# Altium PCB PCB1.PcbDoc
Units mil, origin at the board's own origin, x right, y up, seen from the top; angles counter-clockwise.
Board outline 2915 x 1720 mil, 2 copper layers (Top Layer, Bottom Layer); 19 components, 26 nets, 87 pads, 2 vias.
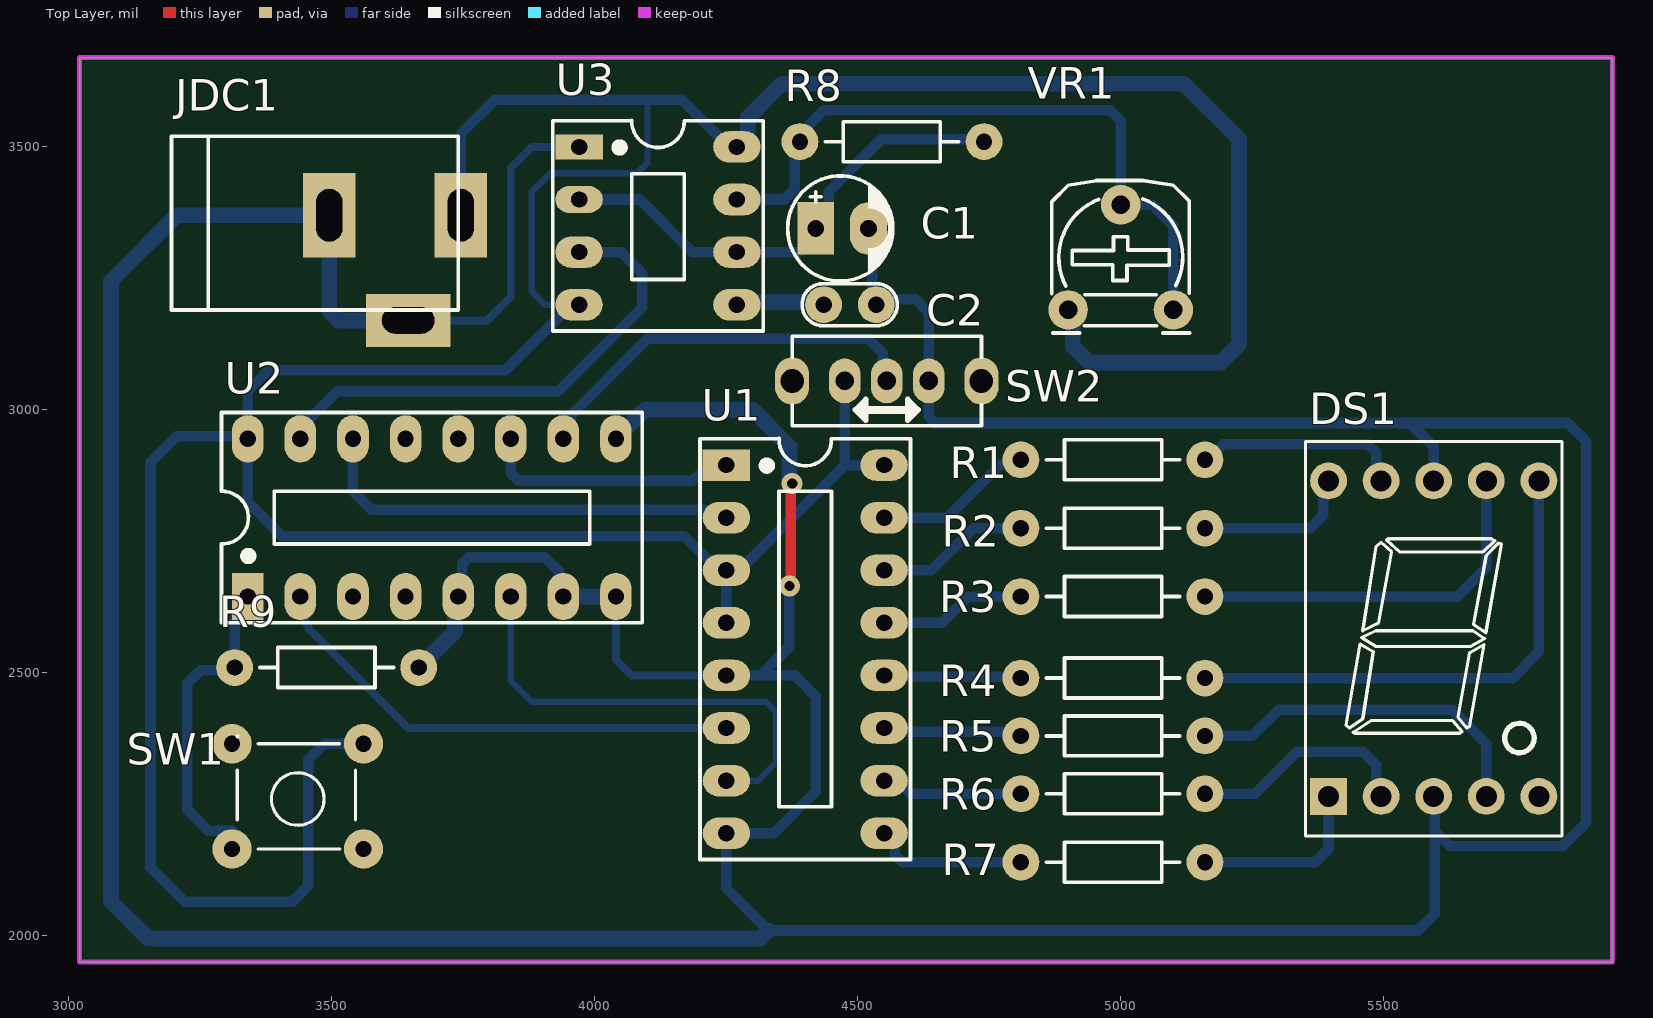
[diagram p0: Top Layer view]
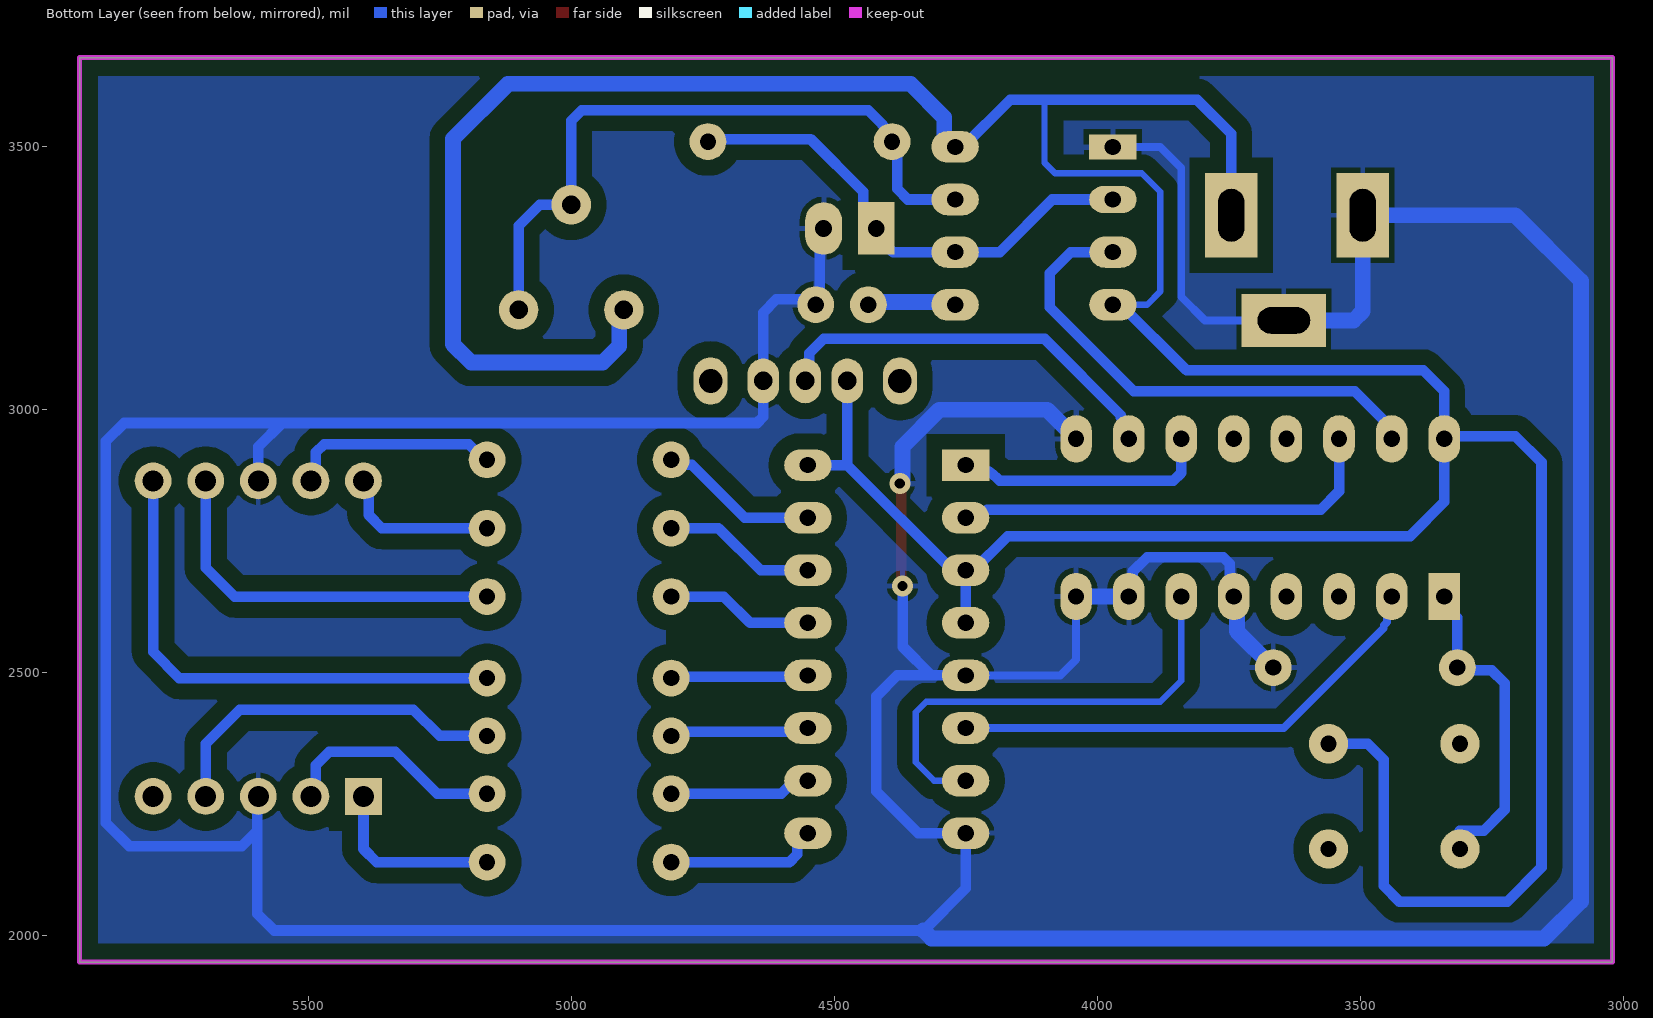
[diagram p1: Bottom Layer view, seen from below]
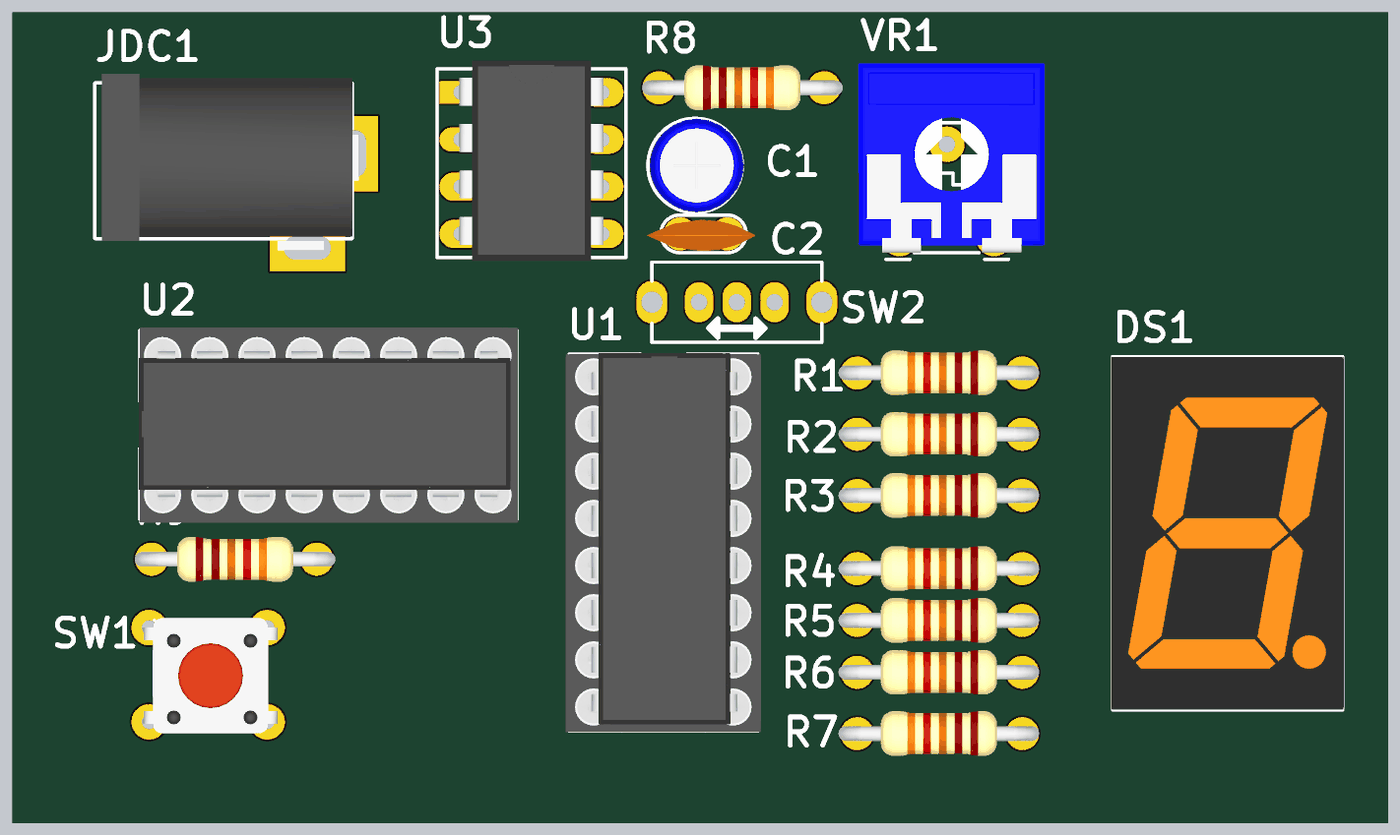
[diagram p2: 3D render of the assembled board from above, using the file's embedded part models]

## Layer stack, top to bottom
Top Solder: solder mask 0.4, Solder Resist, Dk 3.5
Top Layer: signal copper 1.4
Dielectric 1: dielectric 12.6, FR-4, Dk 4.8
Bottom Layer: signal copper 1.4
Bottom Solder: solder mask 0.4, Solder Resist, Dk 3.5

## Board outline
3020,1950 3020,3670 5935,3670 5935,1950

## Design rules (kind name [scope] priority, off if disabled: settings)
Clearance [All] p1: gap=30 ignorepadtopadclearanceinfootprint=FALSE
PolygonConnect [All] p1: connectstyle=Relief reliefconductorwidth=10 reliefentries=4 polygonreliefangle="90 Angle" airgapwidth=10
RoomDefinition Sheet1 [InComponentClass('Sheet1')] p1: confinementstyle=ConfineIn formatcopy=TRUE lockcomponents=FALSE outline 7045,1060 12205,1060 12205,1980 7045,1980
RoutingVias [All] p1: holewidth=28 width=50 viastyle="Through Hole" minholewidth=28 minwidth=50 maxholewidth=28 maxwidth=50
SolderMaskExpansion [All] p1: expansion=4 istentingtop=FALSE
Width [All] p1: maxlimit=50 minlimit=10 preferedwidth=20
30 further rules are at their usual default settings.

## Components (designator, comment, footprint, x,y, rotation, side; value= is the part's Value field where it differs from the comment)
C1 "100uF" CP1/2 4420,3345 r0 top value=10uF/50V
C2 "10nF" CN1 4535,3200 r180 top value=100pF
DS1 "7SEG" LED7SEG-1-0.56 5590,2540 r0 top
JDC1 "Jac DC" DC-IN 3620,3270 r0 top
R1 "330" R1/4W 4810,2905 r0 top value="R1/4W - 1K"
R2 "330" R1/4W 4810,2775 r0 top value="R1/4W - 1K"
R3 "330" R1/4W 4810,2645 r0 top value="R1/4W - 1K"
R4 "330" R1/4W 4810,2490 r0 top value="R1/4W - 1K"
R5 "330" R1/4W 4810,2380 r0 top value="R1/4W - 1K"
R6 "330" R1/4W 4810,2270 r0 top value="R1/4W - 1K"
R7 "330" R1/4W 4810,2140 r0 top value="R1/4W - 1K"
R8 "10k" R1/4W 4740,3510 r180 top value="R1/4W - 1K"
R9 "10k" R1/4W 3665,2510 r180 top value="R1/4W - 1K"
SW1 "SW" SW4 3560,2165 r180 top value="Button chip 4 pin"
SW2 "SW102A" SW102 4475,3055 r0 top value="Switch 102 On Board"
U1 "4511" "DIP 16" 4250,2895 r270 top
U2 "4510" "DIP 16" 3340,2645 r0 top
U3 "NE555" DIP8 4120,3355 r270 top
VR1 "10K" VR 4900,3190 r0 top value="VR 10K"

## Footprints (in the part's own frame and the unit in brackets; to place one, negate y for a bottom-side part, rotate by r counter-clockwise, add the part's x,y. Pads: shape width x height; smd on the part's side, far side on the other; paste and mask are expansions set on the pad)
CN1 [mil]
  round 70 hole 31: 1(0,0) 2(100,0)
  silkscreen extent -40,-40 141,40, body extent -60,-30 170,37, height 265
CP1/2 [mil] "Tu hoa < 22uF/16>50V"
  rect 70x100 hole 32: 1(0,0)
  oval 70x100 hole 32: 2(100,0)
  silkscreen extent -53,-100 147,100, body extent -49,-99 149,99, height 287
DC-IN [mil] "Jac DC input"
  rect 100x160 hole 50 slot 100 at 90 deg: 1(125,100) 2(-125,100)
  rect 160x100 hole 50 slot 100 at 0 deg: 3(25,-100)
  silkscreen extent -425,-80 120,250, body extent -410,-105 134,269, height 434
DIP8 [mil] "DIP, 8-Leads, Row Spacing 7.62mm, Pitch 2.54mm, Body 9.91x6.73mm"
  rect 47.24x90 hole 31: 1(-145,-150)
  oval 51.18x90 hole 31: 2(-45,-150)
  oval 60x90 hole 31: 3(55,-150) 4(155,-150) 5(155,150) 6(55,150) 7(-45,150) 8(-145,150)
  silkscreen extent -195,-200 205,200, body extent -213,-153 213,153, height 177
"DIP 16" [mil]
  rect 60x90 hole 31: 1(0,0)
  oval 60x90 hole 31: 2(100,0) 3(200,0) 4(300,0) 5(400,0) 6(500,0) 7(600,0) 8(700,0) 9(700,300) 10(600,300) 11(500,300) 12(400,300) 13(300,300) 14(200,300) 15(100,300) 16(0,300)
  silkscreen extent -50,-50 750,350, body extent -52,-57 752,356, height 299
LED7SEG-1-0.56 [mil]
  rect 70x70 hole 40: 1(-195,-275)
  round 70 hole 40: 2(-95,-275) 3(5,-275) 4(105,-275) 5(205,-275) 6(205,325) 7(105,325) 8(5,325) 9(-95,325) 10(-195,325)
  silkscreen extent -239,-350 249,400, body extent -241,-349 251,399, height 315
R1/4W [mil] "R 1/4W, 2 Pin, 350mil"
  round 70 hole 31: 1(0,0) 2(350,0)
  silkscreen extent 48,-38 302,38, body extent -40,-47 386,47, height 111
SW4 [mil] "SW button 4pin, 250 x250 mil"
  round 75 hole 31: 1(0,0) 2(250,-200) 3(250,0) 4(0,-200)
  silkscreen extent 15,-215 240,0, body extent -36,-220 276,24, height 276
SW102 [mil] "Switch 102 On Board nho"
  oval 60x85 hole 35: 1(0,0) 2(80,0) 3(160,0)
  oval 65x90 hole 45: 4(260,0) 5(-100,0)
  silkscreen extent -100,-85 260,85
VR [mil] "Resistor Variable"
  round 75 hole 35: 1(0,0) 2(100,200) 3(200,0)
  silkscreen extent -31,-44 231,246, body extent -87,-30 307,372, height 165

## Part data
C1: library part CP1, "Cap P  0,1uF < 22uF , 16 - 50V", Description 1="10 => 220uF/6,3V/10V - 10uF => 100uF/16V", Description 2="0,1uF => 33uF/50V - 10uF => 22uF/63V", Description 3="0,47uF => 10uF/100V"
C2: library part CN1, "Cap np  1pF - 472pF"
DS1: library part LED7SEG-1, "14.2 mm General Purpose Blue 7-Segment Display: CC, RH DP, Gray Surface", Colour=Blue, PackageDocument=24-Sep-2002, ComponentLink1Description="Manufacturer Link", ComponentLink1URL=http://www.agilent.com/, DatasheetDocument=24-Sep-2002, LatestRevisionDate=17-Dec-2003, LatestRevisionNote="Schematic revised, PCB Footprint replaced.", MinimumIntensity="2020 ucd", Note="IF = 10 mA", PackageReference=H, Published=8-Jun-2000, Publisher="Altium Limited"
JDC1: library part DCIN, "Jac DC input"
R1 R2 R3 R4 R5 R6 R7 R8 R9: library part R1/4W, "Resistor 1/4W"
SW1: library part SW4, "Switch button 4 pin"
SW2: "Switch 102 on Broad"
U3: "TIMER IC", Current=200mA, Frequency=500kHz, Manufacturer=STMicroelectronics, Manufacturer Part Number=NE555DT, Operating Temperature="0°C ~ 70°C", Package / Case="8-SOIC (3.9mm Width)", Supplier Part Number=497-1962-2-ND, Voltage - Supply="4.5 V ~ 16 V", Category="Integrated Circuits (ICs)", Count=-, Packaging="Tape & Reel (TR)", RoHS="RoHS Compliant", Supplier=Digi-Key, Supplier 1=Digi-Key, Supplier Part Number 1=497-1962-2-ND, Type="555 Type, Timer/Oscillator (Single)"
VR1: library part VR, "Var Resistor"

## Via types
v1: diameter 39.37, hole 19.68, Top Layer to Bottom Layer, 2 vias

## Nets (pads, with @x,y where several pads share a name; then routed paths per layer and width w, separated by ;. In a path a pad name is that pad's centre, name@x,y a point inside that pad or via, vN(x,y) a via of type N, cw(c..) or ccw(c..) an arc to the next point about the centre after c; other vN are vias at no path point)
a: DS1.7 R3.2 | length 722.8
  Bottom Layer w20: R3.2 5640,2645 5695,2700 DS1.7
AA: U1.7 U2.6 | length 894.4
  Bottom Layer w12: U2.6 3840,2485 3880,2445 4325,2445 4345,2425 4345,2330 4310,2295 U1.7
b: DS1.6 R4.2 | length 980.7
  Bottom Layer w20: R4.2 5745,2490 5795,2540 DS1.6
BB: U1.1 U2.11 | length 518.3
  Bottom Layer w20: U2.11 3840,2880 3855,2865 4185,2865 4190.25,2870.25 cw(c4250,2810.5) U1.1 U1.1@4230,2875
c: DS1.4 R5.2 | length 682.6
  Bottom Layer w20: R5.2 5250,2380 5300,2430 5630,2430 5695,2365 DS1.4
CC: U1.2 U2.14 | length 830.7
  Bottom Layer w20: U2.14 3540,2845 3575,2810 4209.18,2810 4224.18,2795 U1.2
CLK: U2.15 U3.3 | length 966.8
  Bottom Layer w20: U2.15 3440,2965 3510,3035 3930,3035 4090,3195 4090,3260 4050,3300 U3.3
d: DS1.2 R6.2 | length 432.6
  Bottom Layer w20: R6.2 5255,2270 5335,2350 5460,2350 5485.43,2324.57 5485.43,2274.57 DS1.2
DD: U1.6 U2.2 | length 939.9
  Bottom Layer w15: U2.2 3448.61,2636.39 3448.61,2596.39 3455,2590 3455,2585 3645,2395 U1.6
e: DS1.1 R7.2 | length 345.4
  Bottom Layer w20: R7.2 5370,2140 5395,2165 DS1.1
f: DS1.9 R1.2 | length 402.8
  Bottom Layer w20: R1.2 5165,2905 5195,2935 5470,2935 5485.43,2919.57 5485.43,2874.57 DS1.9
g: DS1.10 R2.2 | length 304.5
  Bottom Layer w20: R2.2 5360,2775 5385.43,2800.43 5385.43,2855.43 DS1.10
GND: C1.2 C2.1 DS1.3 DS1.8 JDC1.2 JDC1.3 R9.1 SW2.3 U1.5 U1.8 U2.5 U2.7 U2.8 U2.9 U3.1 | length 10842.7
  Top Layer w20: v1(4370,2665) 4372.5,2667.5 4372.5,2857.5 v1(4375,2860)
  Bottom Layer w15: JDC1.3 3795,3170 3840,3215 3840,3460 3880,3500 U3.1 ; U2.8 4040,2525 4070,2495 U1.5
  Bottom Layer w20: U2.5 3747.65,2652.65 3747.65,2707.65 3760,2720 3905,2720 3932.35,2692.65 3932.35,2652.65 U2.7 ; U1.5 4315,2495 ; v1@4370,2670 v1(4370,2665) 4370,2550 4315,2495 ; C1.2 4527.5,3337.5 4527.5,3207.5 C2.1 ; C2.1@4540,3210 4610,3210 4635,3185 SW2.3 4635,2986.72 4646.72,2975 5550,2975 ; DS1.3 5596.72,2263.28 5596.72,2200 ; DS1.8 5595,2930 5550,2975 ; 4315,2495 4380,2495 4420,2455 4420,2275 4340,2195 U1.8 4250,2090 4330,2010 5565,2010 5596.72,2041.72 5596.72,2200 ; 5550,2975 5850,2975 5885,2940 5885,2215 5840,2170 5626.72,2170 5596.72,2200
  Bottom Layer w30: JDC1.3 3512.57,3170 3495,3187.57 JDC1.2 3205,3370 3080,3245 3080,2065 3150,1995 4315,1995 4330,2010 ; R9.1 3734.26,2579.26 3734.26,2639.26 U2.5 ; U2.7 U2.8 ; U2.9 4040,2951.88 4053.86,2965.74 4060.74,2965.74 4095,3000 4300,3000 4370,2930 v1@4370,2860
NetC1_1: C1.1 R8.1 U3.2 U3.6 | length 956.8
  Bottom Layer w20: U3.2 4085,3400 4185,3300 U3.6 4388.08,3300 C1.1@4428.08,3340 ; C1.1@4420,3335 4445,3360 4445,3415 4545,3515 4735,3515 R8.1 ; C1.1@4428.08,3350 C1.1@4440,3350
NetC2_2: C2.2 U3.5 | length 174.1
  Bottom Layer w30: U3.5 4275,3205 4435,3205 C2.2@4440,3210
NetR1_1: R1.1 U1.15 | length 305.6
  Bottom Layer w20: U1.15 4670,2795 4770.43,2895.43 4800.43,2895.43 R1.1
NetR2_1: R2.1 U1.14 | length 293.1
  Bottom Layer w20: U1.14 4640,2695 4720,2775 R2.1
NetR3_1: R3.1 U1.13 | length 280.7
  Bottom Layer w20: U1.13 4660,2595 4710,2645 R3.1
NetR4_1: R4.1 U1.12 | length 262.1
  Bottom Layer w20: U1.12 4552.5,2492.5 4807.5,2492.5 R4.1
NetR5_1: R5.1 U1.11 | length 266.2
  Bottom Layer w20: U1.11 4557.5,2387.5 4802.5,2387.5 R5.1
NetR6_1: R6.1 U1.10 | length 270.4
  Bottom Layer w20: U1.10 4575.82,2295 4600.82,2270 R6.1
NetR7_1: R7.1 U1.9 | length 295.4
  Bottom Layer w20: U1.9 4551.52,2195 4570,2176.52 4570,2155 4585,2140 R7.1
NetR8_2: R8.2 U3.7 VR1.2 VR1.3 | length 1300.9
  Bottom Layer w20: U3.7 4360,3400 4380.43,3420.43 4380.43,3500.43 R8.2 4390,3523.53 4408.46,3541.99 4408.46,3543.46 4435,3570 4980,3570 5000,3550 VR1.2 5060,3390 5100,3350 VR1.3
RE: R9.2 SW1.3 U2.1 | length 589.4
  Bottom Layer w20: SW1.3@3310,2200 3265,2200 3225,2240 3225,2480 3250,2505 3310,2505 R9.2 3315,2605 3340,2630 U2.1
UD: SW2.2 U2.10 | length 770.8
  Bottom Layer w20: U2.10 3940,2970.82 3954.93,2985.75 3954.93,2989.93 4100,3135 4520,3135 4547.35,3107.65 4547.35,3062.65 SW2.2
VCC: JDC1.1 SW1.4 SW2.1 U1.3 U1.4 U1.16 U2.16 U3.4 U3.8 VR1.1 | length 7450.7
  Bottom Layer w12: U3.4 3955,3200 3905,3200 3880,3225 3880,3415 3915,3450 4080,3450 4100,3470 4100,3590
  Bottom Layer w20: SW1.4 3485,2365 3455,2335 3455,2095 3425,2065 3220,2065 3155,2130 3155,2900 3205,2950 3335,2950 U2.16 ; JDC1.1 3745,3525 3810,3590 4100,3590 4165,3590 4255,3500 U3.8 ; U3.4@3955,3200 3830,3075 3380,3075 3340,3035 U2.16 ; U1.4 U1.3 ; SW2.1 4475,2895 ; U1.16 4475,2895 ; U2.16 3340,2825 3405,2760 4170,2760 4235,2695 U1.3 ; U1.3 4275,2695 4475,2895
  Bottom Layer w30: U3.8 4276.88,3500 4290.74,3513.86 4290.74,3555.74 4355,3620 5120,3620 5225,3515 5225,3125 5190,3090 4940,3090 4908.61,3121.39 4908.61,3181.39 VR1.1
pads on no net: DS1.5 SW1.1 SW1.2 SW2.4 SW2.5 U2.3 U2.4 U2.12 U2.13

## Polygon pours and split planes (outlines as drawn)
GND on Bottom Layer "GND_L02_P000" (solid, remove dead copper, pour order 0): 3020,1950 5935,1950 5935,3670 3020,3670

## Keep-outs
Keep-Out Layer:
  the board outline again, w10

## Other copper
Bottom Layer:
  pour cut-out: 4105,3175 4120,3160 4215,3160 4215,3200 4295,3280 4295,3585 4345,3635 4330,3650 4165,3650 4125,3610 4090,3610 4090,3375 4085,3370
  pour cut-out: 5205,2795 5345,2795 5370,2820 5370,2890 5340,2920 5205,2920 5150,2865
  pour cut-out: 5160,2235 5210,2235 5280,2305 5345,2305 5345,2250 5375,2220 5375,2175 5345,2175 5300,2130 5195,2130
  pour cut-out: 4615,2750 4695,2750 4765,2820 4820,2765 4820,2180 4755,2115 4580,2115 4550,2145 4550,2480
  pour cut-out: 3190,2905 3190,2135 3180,2125 3250,2055 3425,2055 3475,2105 3475,2345 3555,2425 3555,2485 3405,2635 3405,2735 3450,2780 3820,2780 3855,2815 3830,2840 3830,2875 3795,2910 3795,2915 3740,2915 3700,2955 3280,2955